# EAGLE board sequencer_gate_LED_addon_10_step (EAGLE 5.07)
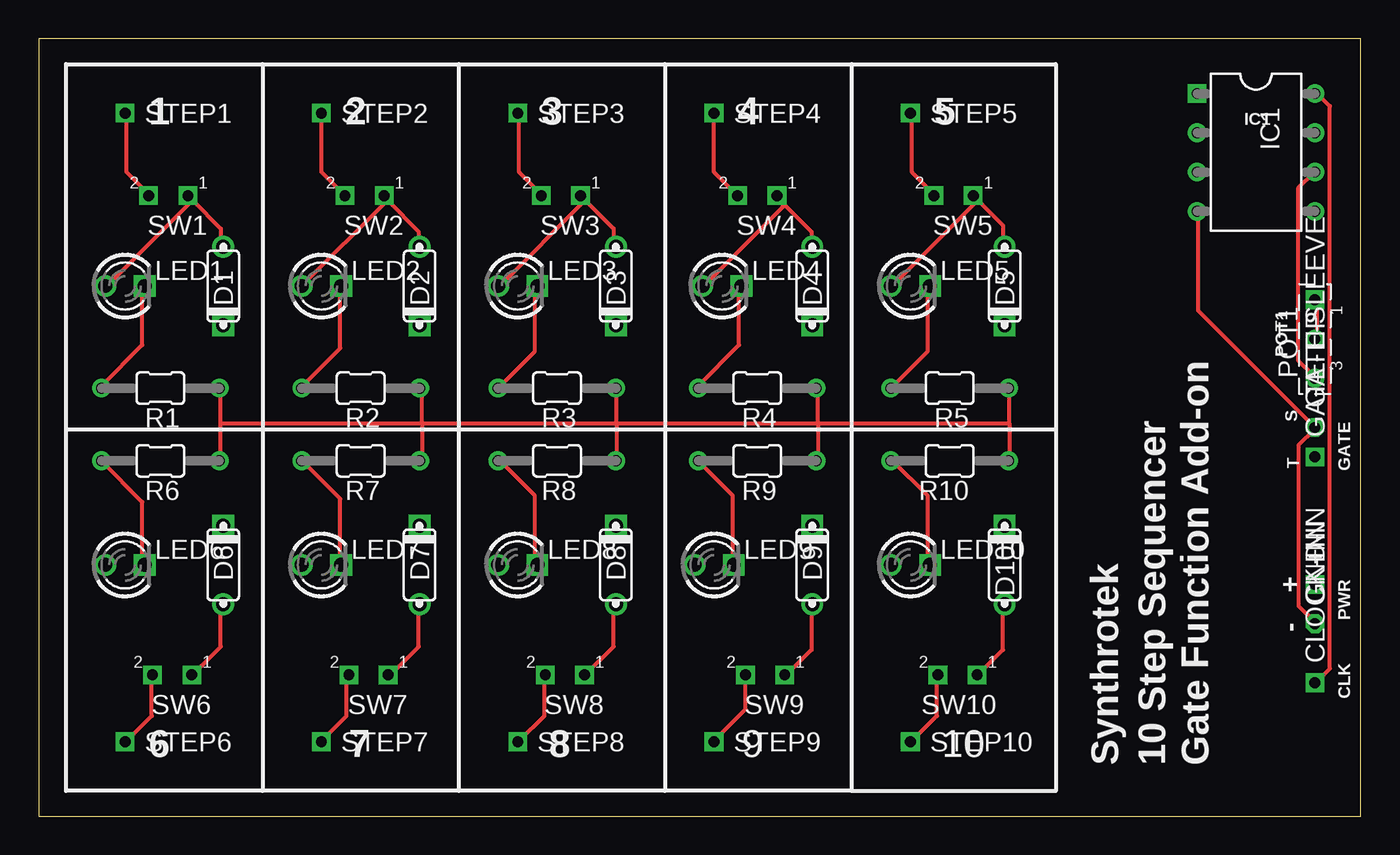
[diagram p0: board, top side]
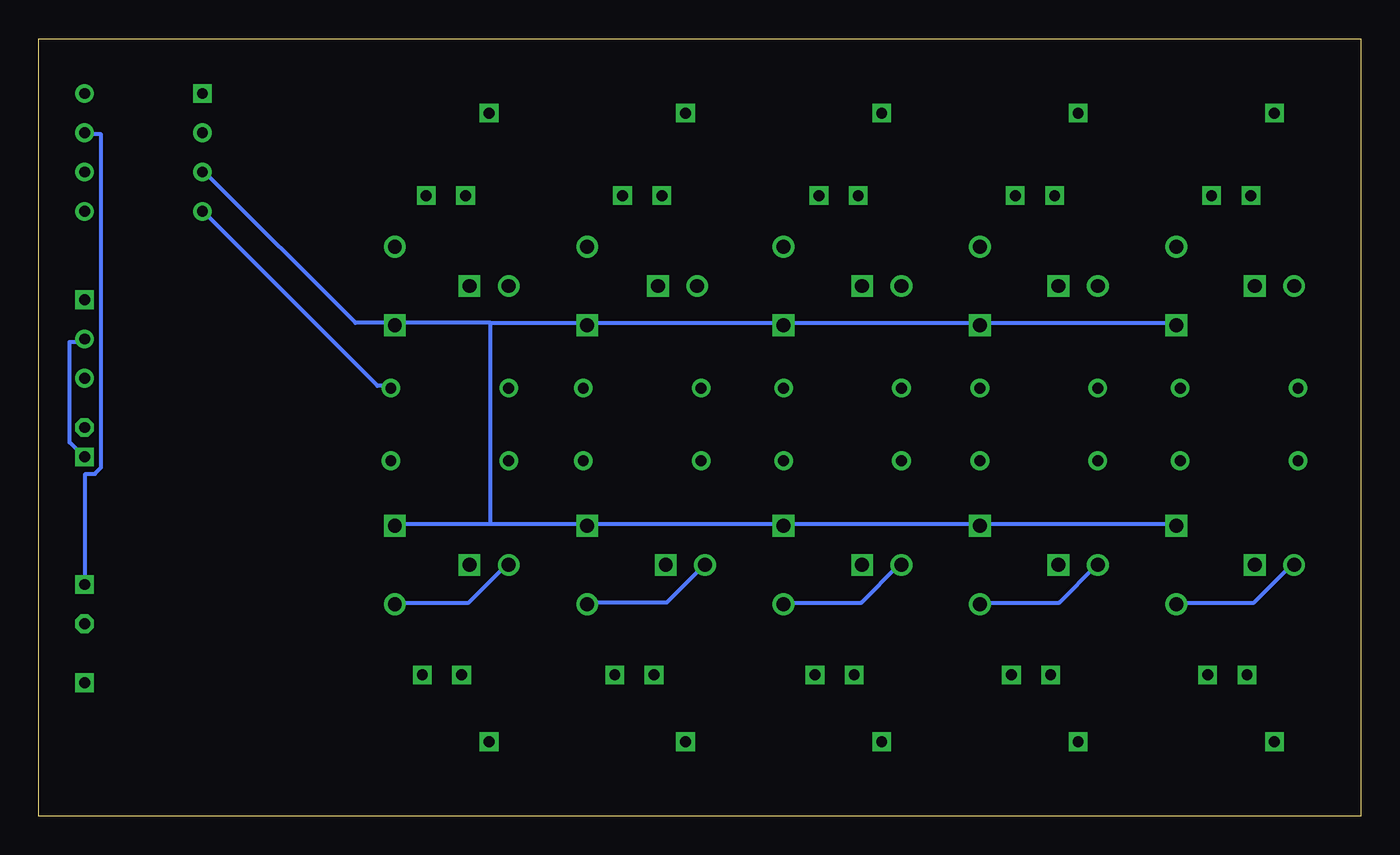
[diagram p1: board, bottom side, seen from below]

Size 85.52 x 50.28 mm. Coordinates in mm from the lower left corner, seen from the top.
Outline: 0,0 85.52,0 85.52,50.28 0,50.28 0,0
Copper layers (1*16): Top 0.035mm / dielectric 1.5mm / Bottom 0.035mm
Design rules "default": minimum track width 10mil, minimum drill 24mil, track to track 8mil, track to pad 8mil, pad to pad 8mil, via to via 8mil, smd to smd 8mil, copper to edge 40mil, drill to drill 8mil, minimum pad ring 10mil, minimum via ring 8mil, stop-mask expansion 4mil, vias tented up to drill 0mil, thermal gap 10mil

## Footprints (pad centres in the part's own frame; a part is rotated, then mirrored left to right if it is on the bottom)
SQUARE = drill 0.7 square: 1 0,0
DO35-2 = drill 0.9 round: A 2.54,0 | drill 0.9 square: C -2.54,0
OCTOGON = drill 0.7 octagon: 1 0,0
DIL08 = drill 0.7 square: 1 -3.81,-3.81 | drill 0.7 round: 2 -1.27,-3.81; 3 1.27,-3.81; 4 3.81,-3.81; 5 3.81,3.81; 6 1.27,3.81; 7 -1.27,3.81; 8 -3.81,3.81
LED3MM = drill 0.9 round: A -1.27,0 | drill 0.9 square: K 1.27,0
POT = drill 0.7 square: 1 2.54,0 | drill 0.7 round: 2 0,0; 3 -2.54,0
R0204/3 = drill 0.7 round: 1 -3.81,0; 2 3.81,0
SPST = drill 0.7 square: 1 -1.27,0; 2 1.27,0

## Placement (x,y rotation side)
+IN  [SQUARE]  82.55,14.99 90 top
CLOCK-IN  [SQUARE]  82.55,8.64 90 top
D1  1N4148-2  [DO35-2]  11.94,34.29 90 top
D2  1N4148-2  [DO35-2]  24.64,34.29 90 top
D3  1N4148-2  [DO35-2]  37.34,34.29 90 top
D4  1N4148-2  [DO35-2]  50.04,34.29 90 top
D5  1N4148-2  [DO35-2]  62.48,34.29 90 top
D6  1N4148-2  [DO35-2]  11.94,16.26 270 top
D7  1N4148-2  [DO35-2]  24.64,16.26 270 top
D8  1N4148-2  [DO35-2]  37.34,16.26 270 top
D9  1N4148-2  [DO35-2]  50.04,16.26 270 top
D10  1N4148-2  [DO35-2]  62.48,16.26 270 top
GATE-SLEEVE  [OCTOGON]  82.55,25.15 90 top
GATE-TIP  [SQUARE]  82.55,23.24 90 top
GND-IN  [OCTOGON]  82.55,12.45 90 top
IC1  [DIL08]  78.74,42.93 270 top
LED1  LED3MM  [LED3MM]  5.59,34.29 0 top
LED2  LED3MM  [LED3MM]  18.29,34.29 0 top
LED3  LED3MM  [LED3MM]  30.99,34.29 0 top
LED4  LED3MM  [LED3MM]  44.2,34.29 0 top
LED5  LED3MM  [LED3MM]  56.39,34.29 0 top
LED6  LED3MM  [LED3MM]  5.59,16.26 0 top
LED7  LED3MM  [LED3MM]  18.29,16.26 0 top
LED8  LED3MM  [LED3MM]  30.99,16.26 0 top
LED9  LED3MM  [LED3MM]  43.69,16.26 0 top
LED10  LED3MM  [LED3MM]  56.39,16.26 0 top
POT1  [POT]  82.55,30.86 90 top
R1  1k  [R0204/3]  7.87,27.69 180 top
R2  1k  [R0204/3]  20.83,27.69 180 top
R3  1k  [R0204/3]  33.53,27.69 180 top
R4  1k  [R0204/3]  46.48,27.69 180 top
R5  1k  [R0204/3]  58.93,27.69 180 top
R6  1k  [R0204/3]  7.87,22.99 180 top
R7  1k  [R0204/3]  20.83,22.99 180 top
R8  1k  [R0204/3]  33.53,22.99 180 top
R9  1k  [R0204/3]  46.48,22.99 180 top
R10  1k  [R0204/3]  58.93,22.99 180 top
STEP1  [SQUARE]  5.59,45.47 0 top
STEP2  [SQUARE]  18.29,45.47 0 top
STEP3  [SQUARE]  30.99,45.47 0 top
STEP4  [SQUARE]  43.69,45.47 0 top
STEP5  [SQUARE]  56.39,45.47 0 top
STEP6  [SQUARE]  5.59,4.83 0 top
STEP7  [SQUARE]  18.29,4.83 0 top
STEP8  [SQUARE]  30.99,4.83 0 top
STEP9  [SQUARE]  43.69,4.83 0 top
STEP10  [SQUARE]  56.39,4.83 0 top
SW1  SPST  [SPST]  8.38,40.13 180 top
SW2  SPST  [SPST]  21.08,40.13 180 top
SW3  SPST  [SPST]  33.78,40.13 180 top
SW4  SPST  [SPST]  46.48,40.13 180 top
SW5  SPST  [SPST]  59.18,40.13 180 top
SW6  SPST  [SPST]  8.64,9.14 180 top
SW7  SPST  [SPST]  21.34,9.14 180 top
SW8  SPST  [SPST]  34.04,9.14 180 top
SW9  SPST  [SPST]  46.99,9.14 180 top
SW10  SPST  [SPST]  59.44,9.14 180 top

## Library data of the parts
+IN CLOCK-IN GATE-SLEEVE GATE-TIP GND-IN STEP1-STEP10 = gm-supply
D1-D10 LED1-LED10 = gm-diodes
IC1 = gm-ics
POT1 = gm-pots
R1-R10 = gm-resistors
SW1-SW10 = gm-switches

## Nets
D1: D10.A LED10.A SW10.1
D10: D2.A LED2.A SW2.1
GND: GATE-SLEEVE.1 GND-IN.1 IC1.4 R1.1 R2.1 R3.1 R4.1 R5.1 R6.1 R7.1 R8.1 R9.1 R10.1
N$1: STEP3.1 SW3.2
N$2: D3.A LED3.A SW3.1
N$3: LED3.K R3.2
N$4: STEP4.1 SW4.2
N$5: D4.A LED4.A SW4.1
N$6: LED4.K R4.2
N$7: STEP5.1 SW5.2
N$8: D5.A LED5.A SW5.1
N$9: LED5.K R5.2
N$10: STEP6.1 SW6.2
N$11: D6.A LED6.A SW6.1
N$12: LED6.K R6.2
N$13: STEP7.1 SW7.2
N$14: D7.A LED7.A SW7.1
N$15: LED7.K R7.2
N$16: STEP8.1 SW8.2
N$17: D8.A LED8.A SW8.1
N$18: LED8.K R8.2
N$19: STEP1.1 SW1.2
N$20: D1.A LED1.A SW1.1
N$21: LED1.K R1.2
N$22: STEP2.1 SW2.2
N$23: STEP9.1 SW9.2
N$24: LED2.K R2.2
N$25: D1.C D2.C D3.C D4.C D5.C D6.C D7.C D8.C D9.C D10.C IC1.3
N$26: +IN.1 IC1.7
N$27: D9.A LED9.A SW9.1
N$28: IC1.6 POT1.3
N$29: GATE-TIP.1 POT1.1 POT1.2
N$30: CLOCK-IN.1 IC1.8
N$31: LED9.K R9.2
N$32: STEP10.1 SW10.2
N$33: LED10.K R10.2

## Tracks (layer width: path | path; a pad name or v marks a point on that pad's centre or on a via)
D1
  Top 0.254: SW10.1 60.76,9.14 62.38,10.77 62.38,13.61 D10.A
  Bottom 0.254: LED10.A 55.27,16.26 57.71,13.82 62.38,13.82 D10.A
D10
  Top 0.254: 22.55,39.83 24.59,37.8 24.59,36.98 D2.A | 22.55,39.83 22.35,40.03 SW2.1 22.55,39.83 | LED2.A 22.55,39.83
GND
  Top 0.254: 37.39,25.4 37.39,27.64 R3.1 | 37.39,25.4 37.39,23.16 R8.1 | 11.79,25.4 11.79,27.64 R1.1 | 11.79,25.4 11.79,23.16 R6.1 | 24.79,25.4 24.79,27.64 R2.1 | 24.79,25.4 24.79,23.16 R7.1 | 11.79,25.4 24.79,25.4 | 24.79,25.4 37.39,25.4 | GND-IN.1 82.5,12.6 81.48,13.61 81.48,23.98 82.5,24.99 GATE-SLEEVE.1 74.98,32.72 74.98,39.01 IC1.4 | 50.39,25.4 50.39,27.64 R4.1 | 50.39,25.4 50.39,23.16 R9.1 | 62.79,25.4 62.79,27.64 R5.1 | 62.79,25.4 62.79,23.16 R10.1 | 50.39,25.4 62.79,25.4 | 37.39,25.4 50.39,25.4
  Bottom 0.254: IC1.4 74.78,39.01 63.6,27.84 62.79,27.84 R5.1
N$1
  Top 0.254: SW3.2 32.51,40.23 31.09,41.66 31.09,45.31 STEP3.1
N$2
  Top 0.254: 35.36,39.83 37.19,38 37.19,36.98 D3.A | 35.36,39.83 SW3.1 35.15,40.03 | 35.36,39.83 29.87,34.34 LED3.A
N$3
  Top 0.254: R3.2 32.11,30.07 32.11,34.14 LED3.K
N$4
  Top 0.254: SW4.2 43.69,41.66 STEP4.1
N$5
  Top 0.254: 48.16,39.62 49.99,37.8 49.99,36.98 D4.A | 48.16,39.62 47.75,40.03 SW4.1 48.16,39.62 | 48.16,39.62 48.16,39.42 43.08,34.34 LED4.A
N$6
  Top 0.254: R4.2 42.67,27.84 45.31,30.48 45.31,34.14 LED4.K
N$7
  Top 0.254: SW5.2 57.91,40.23 56.49,41.66 56.49,45.31 STEP5.1
N$8
  Top 0.254: 60.76,39.83 62.38,38.2 62.38,36.98 D5.A | 60.76,39.83 SW5.1 60.55,40.03 | 60.76,39.83 55.27,34.34 LED5.A
N$9
  Top 0.254: R5.2 57.51,30.07 57.51,34.14 LED5.K
N$10
  Top 0.254: STEP6.1 5.69,4.88 7.32,6.5 7.32,9.14 SW6.2
N$11
  Top 0.254: SW6.1 9.96,9.14 11.79,10.97 11.79,13.61 D6.A
  Bottom 0.254: LED6.A 4.47,16.26 6.91,13.82 11.79,13.82 D6.A
N$12
  Top 0.254: R6.2 4.06,22.96 6.71,20.32 6.71,16.26 LED6.K
N$13
  Top 0.254: STEP7.1 18.29,4.88 19.91,6.5 19.91,9.14 SW7.2
N$14
  Top 0.254: SW7.1 22.76,9.14 24.59,10.97 24.59,13.61 D7.A
  Bottom 0.254: LED7.A 17.07,16.26 19.51,13.82 24.59,13.82 D7.A
N$15
  Top 0.254: R7.2 17.07,22.96 19.51,20.52 19.51,16.26 LED7.K
N$16
  Top 0.254: STEP8.1 31.09,4.88 32.72,6.5 32.72,9.14 SW8.2
N$17
  Top 0.254: SW8.1 35.36,9.14 37.19,10.97 37.19,13.61 D8.A
  Bottom 0.254: LED8.A 29.87,16.26 32.31,13.82 37.19,13.82 D8.A
N$18
  Top 0.254: R8.2 29.87,22.96 32.11,20.73 32.11,16.26 LED8.K
N$19
  Top 0.254: SW1.2 7.11,40.23 5.69,41.66 5.69,45.31 STEP1.1
N$20
  Top 0.254: 9.96,39.83 11.79,38 11.79,36.98 D1.A | 9.96,39.83 SW1.1 9.75,40.03 | 9.96,39.83 4.47,34.34 LED1.A
N$21
  Top 0.254: R1.2 4.06,27.84 6.71,30.48 6.71,34.14 LED1.K
N$22
  Top 0.254: SW2.2 18.29,41.66 STEP2.1
N$23
  Top 0.254: SW9.2 45.72,6.91 43.69,4.88 STEP9.1
N$24
  Top 0.254: R2.2 17.07,27.84 19.51,30.28 19.51,34.14 LED2.K
N$25
  Bottom 0.254: 56.29,18.9 62.38,18.9 D10.C | 56.29,18.9 50.19,18.9 D9.C 49.99,18.9 37.39,18.9 D8.C 37.19,18.9 24.79,18.9 D7.C 24.59,18.9 11.99,18.9 D6.C | D1.C 11.99,31.9 24.59,31.9 D2.C 24.79,31.9 37.19,31.9 D3.C 37.39,31.9 49.99,31.9 D4.C 50.19,31.9 56.29,31.9 | IC1.3 74.78,41.66 65.02,31.9 62.59,31.9 D5.C 62.38,31.9 56.29,31.9 | 56.29,18.9 56.29,31.9
N$26
  Bottom 0.254: +IN.1 82.5,15.04 82.5,22.15 81.89,22.15 81.48,22.55 81.48,44.09 82.5,44.09 IC1.7
N$27
  Top 0.254: SW9.1 48.36,9.14 49.99,10.77 49.99,13.61 D9.A
  Bottom 0.254: LED9.A 42.47,16.26 44.91,13.82 49.99,13.82 D9.A
N$28
  Top 0.254: POT1.3 82.5,28.45 81.48,29.46 81.48,40.64 82.5,41.66 IC1.6
N$29
  Top 0.254: POT1.1 82.7,33.33 82.7,30.89 POT1.2
  Bottom 0.254: GATE-TIP.1 82.7,23.37 83.52,24.18 83.52,30.68 82.7,30.68 POT1.2
N$30
  Top 0.254: CLOCK-IN.1 82.7,8.74 83.52,9.55 83.52,45.92 82.7,46.74 IC1.8
N$31
  Top 0.254: R9.2 42.67,22.96 44.91,20.73 44.91,16.26 LED9.K
N$32
  Top 0.254: STEP10.1 56.49,4.88 58.12,6.5 58.12,9.14 SW10.2
N$33
  Top 0.254: R10.2 55.27,22.96 57.51,20.73 57.51,16.26 LED10.K

## Text on the board
tPlace: 1 | 2 | 3 | 4 | 5 | IC1 | POT1 | S | T | GATE | + | PWR | - | CLK | 6 | 7 | 8 | 9 | 10 | Synthrotek | 10 Step Sequencer | Gate Function Add-on